# Altium PCB PCB1.PcbDoc
Units mil, origin at the board's own origin, x right, y up, seen from the top; angles counter-clockwise.
Board outline 3760 x 2995 mil, 2 copper layers (Top Layer, Bottom Layer); 104 components, 66 nets, 280 pads, 61 vias.
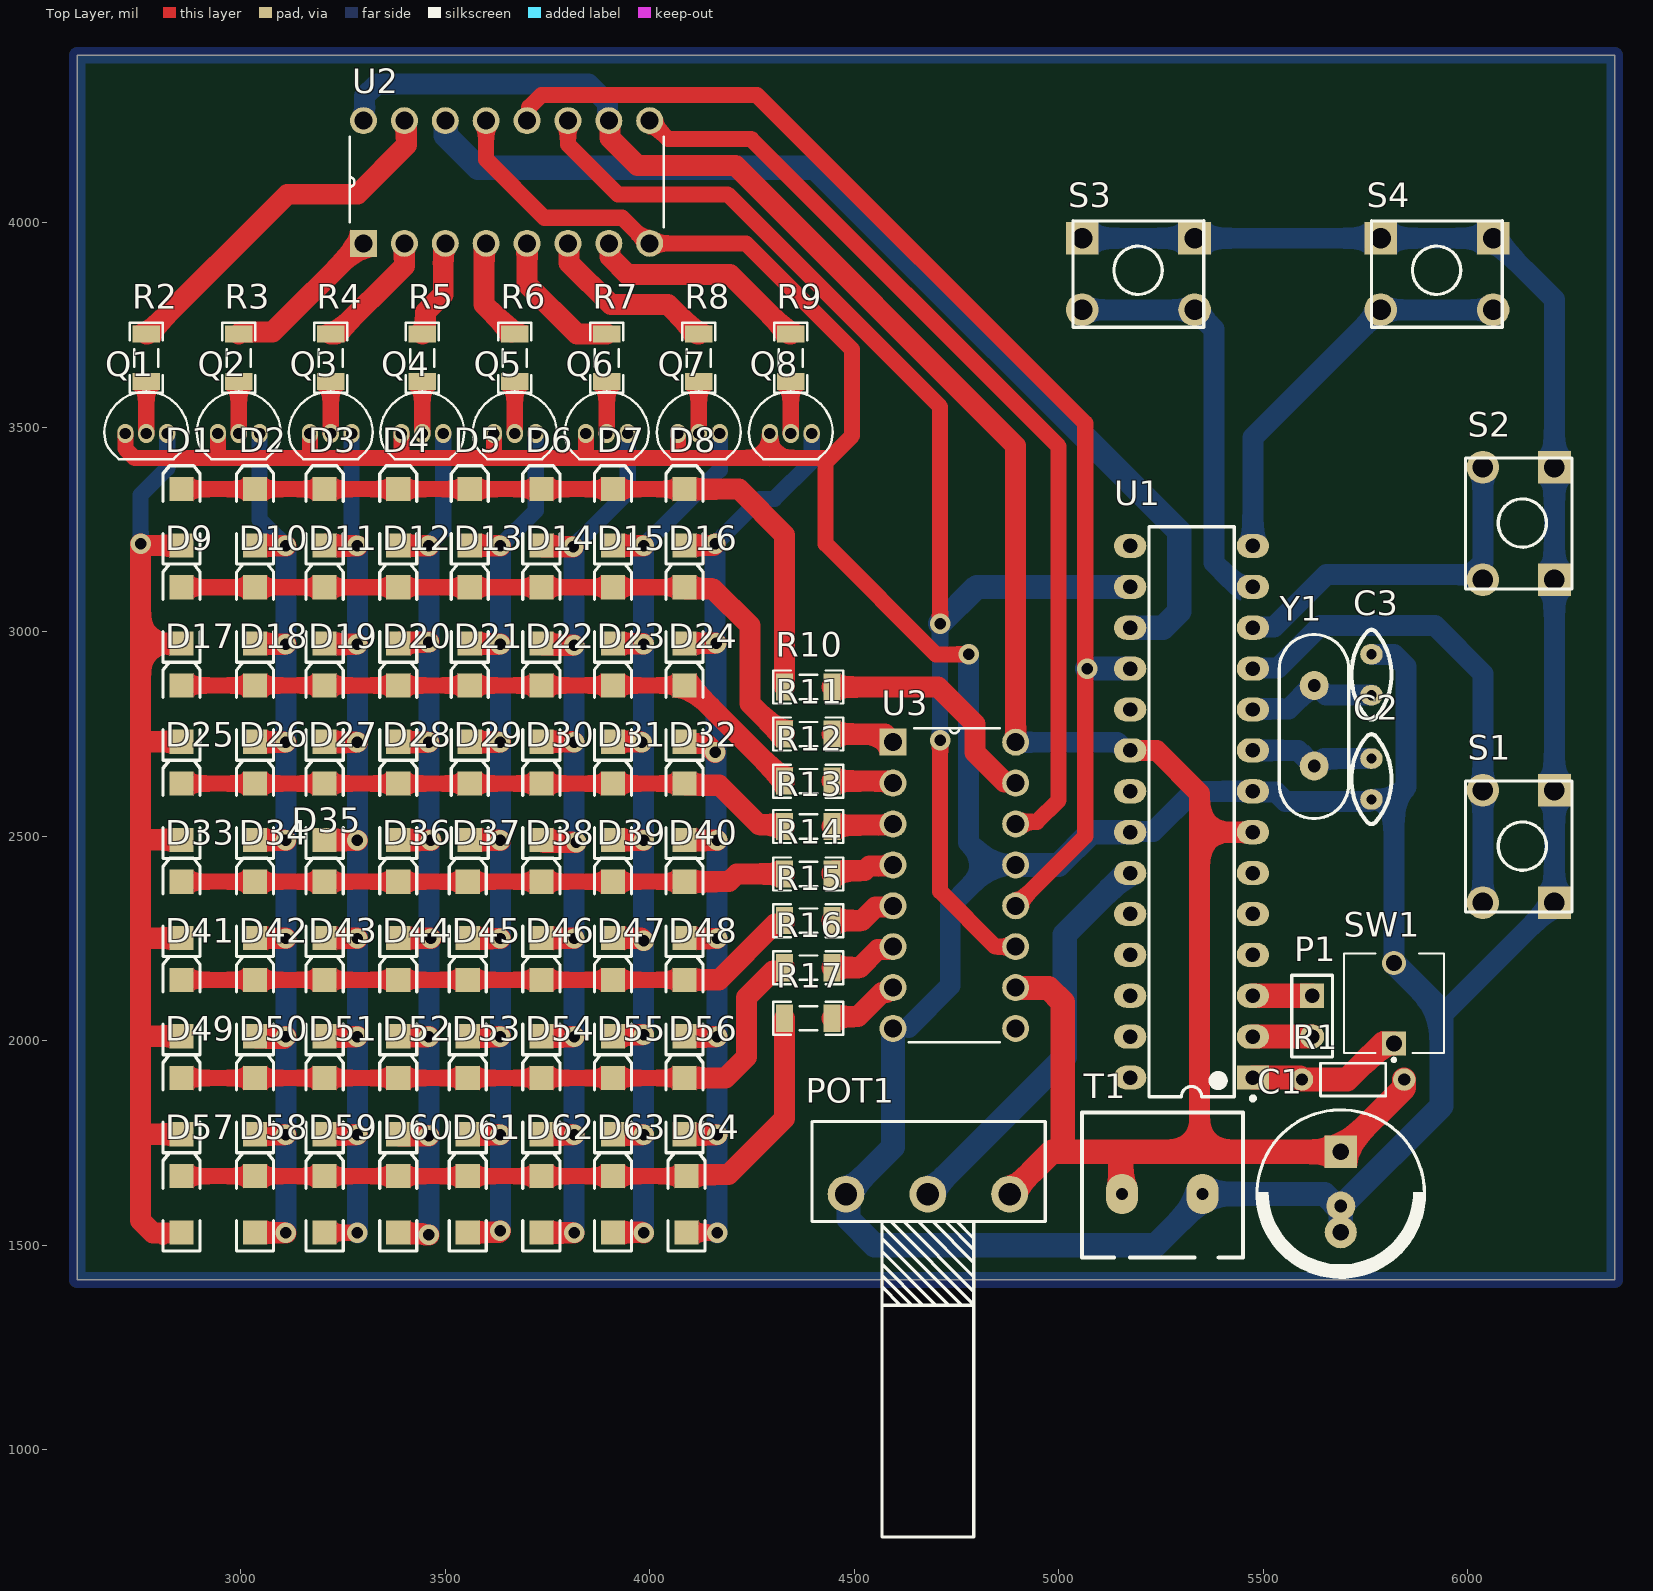
[diagram p0: Top Layer view]
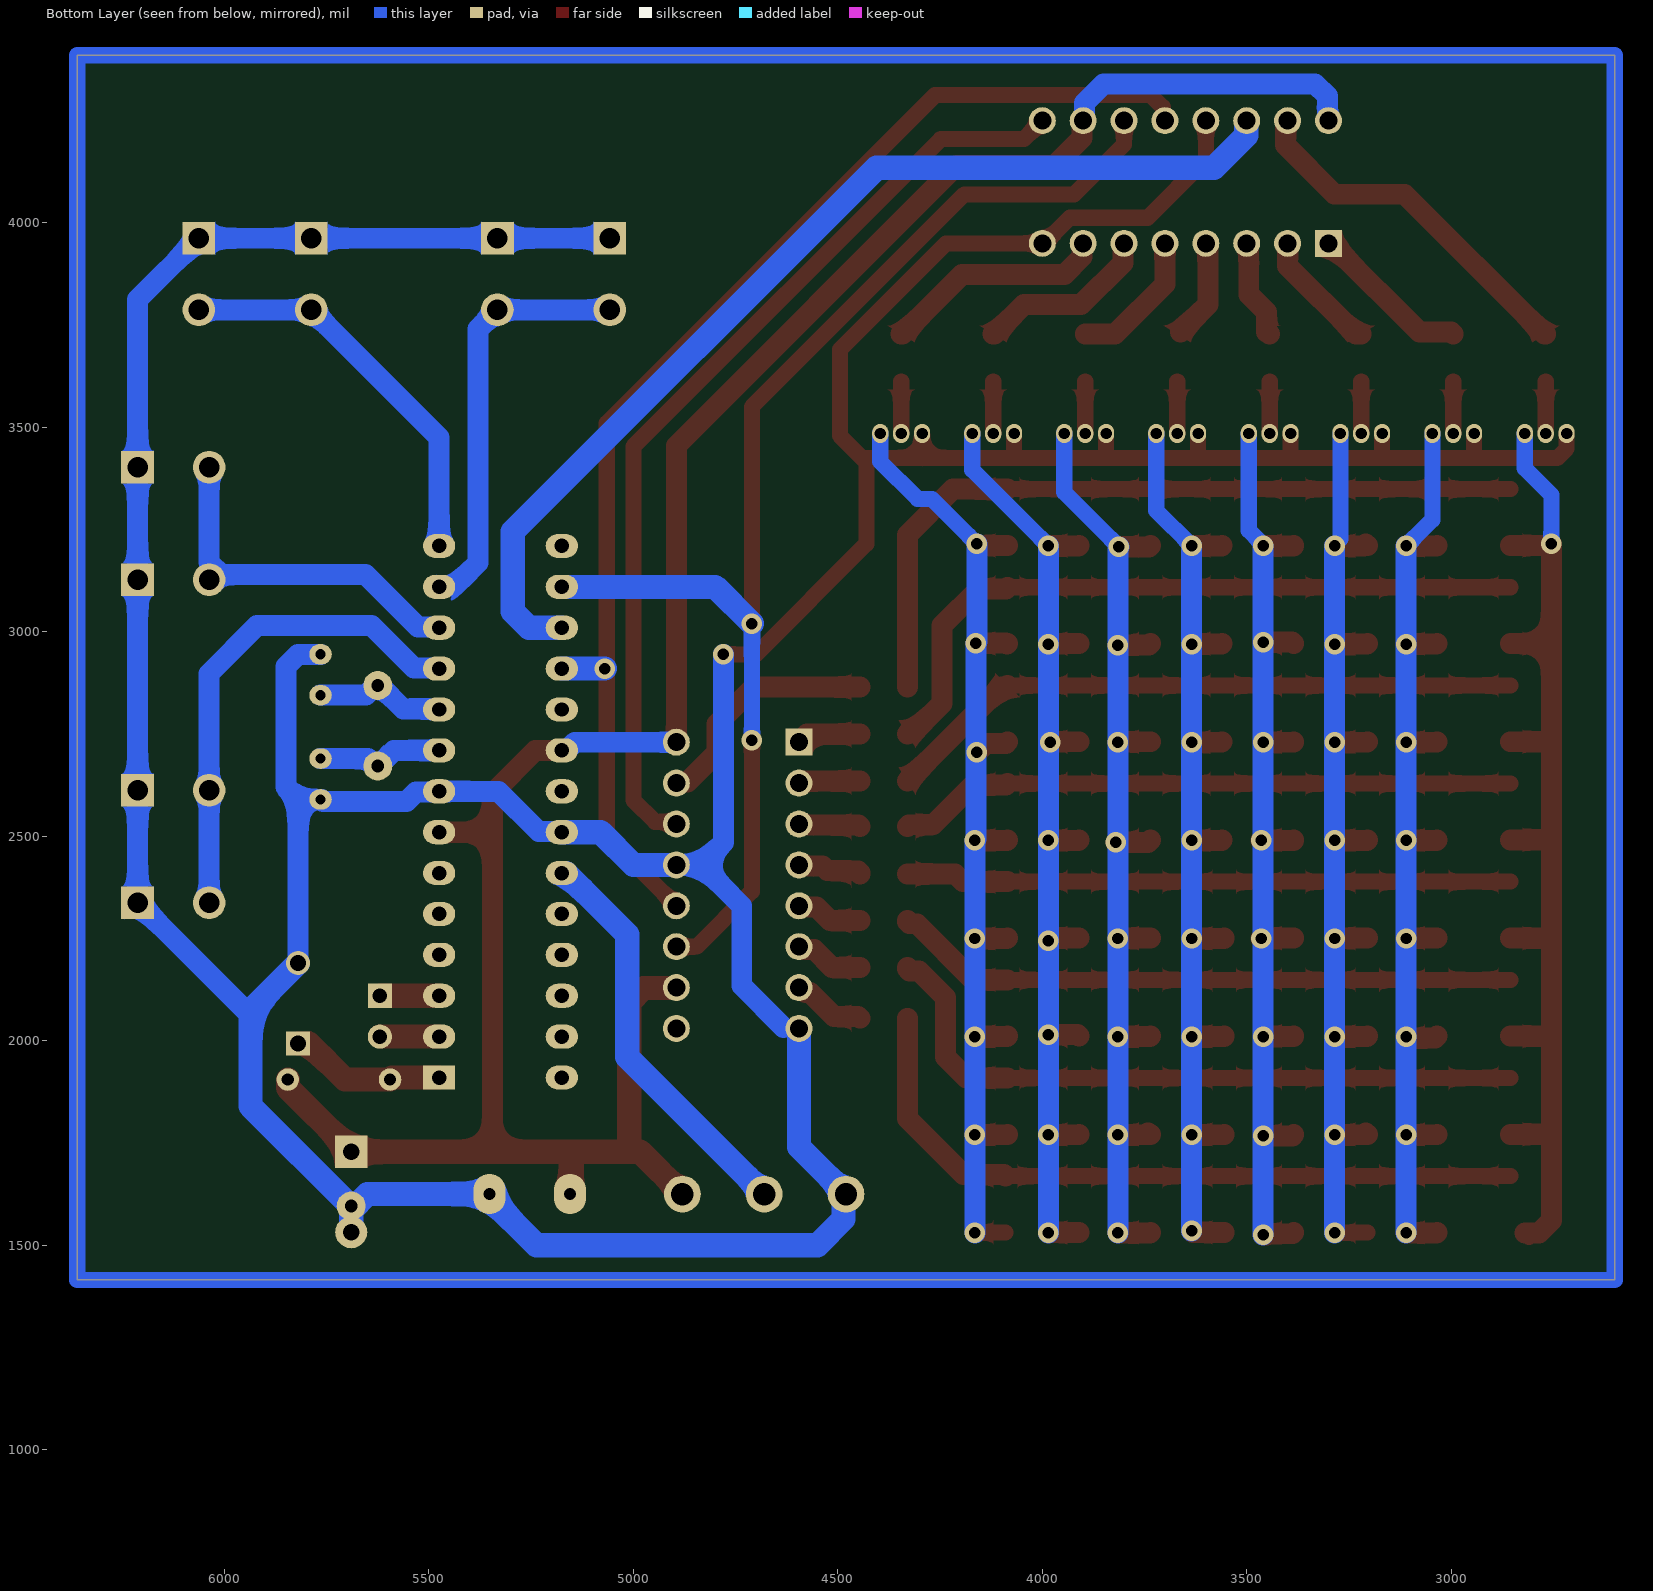
[diagram p1: Bottom Layer view, seen from below]
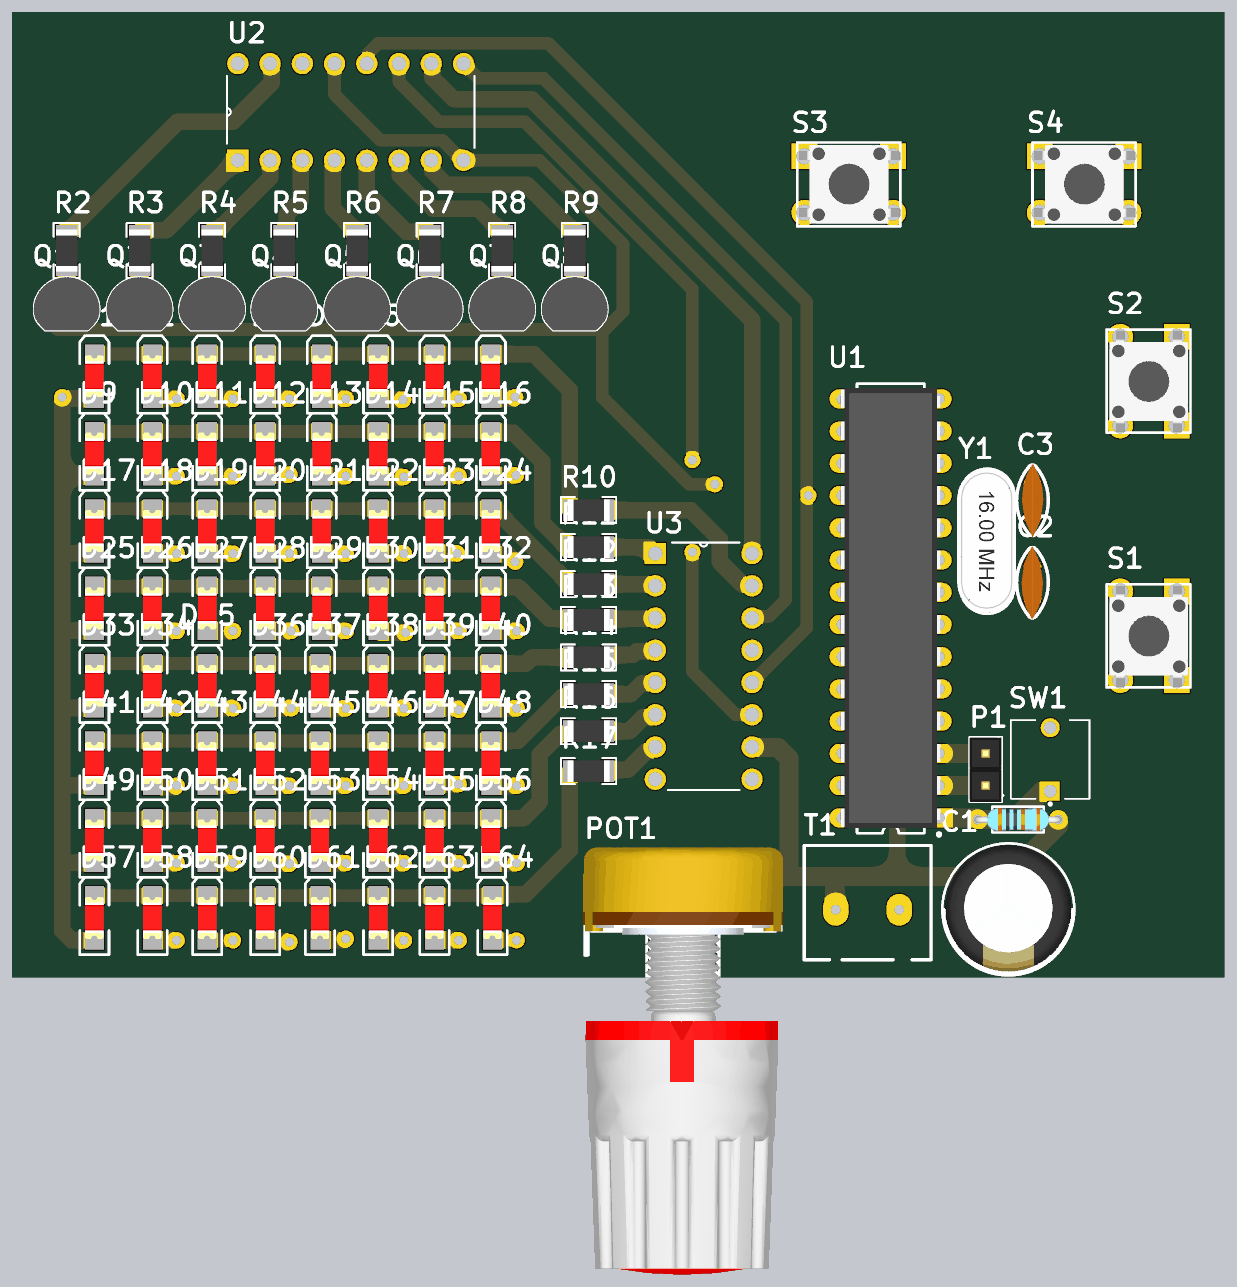
[diagram p2: 3D render of the assembled board from above, using the file's embedded part models]

## Layer stack, top to bottom
Top Solder: solder mask 0.4, Solder Resist, Dk 3.5
Top Layer: signal copper 1.4
Dielectric 1: dielectric 12.6, FR-4, Dk 4.8
Bottom Layer: signal copper 1.4
Bottom Solder: solder mask 0.4, Solder Resist, Dk 3.5

## Board outline
2600,1415 2600,4410 6360,4410 6360,1415

## Design rules (kind name [scope] priority, off if disabled: settings)
Clearance [All] p1: gap=10 ignorepadtopadclearanceinfootprint=FALSE except(0: Arc-Hole Track-Hole SMDPad-Hole THPad-Hole Via-Hole Fill-Hole Poly-Hole Region-Hole Text-Hole)
PolygonConnect [All] p1: connectstyle=Relief reliefconductorwidth=10 reliefentries=4 polygonreliefangle="90 Angle" airgapwidth=10
RoutingVias [All] p1: holewidth=28 width=50 viastyle="Through Hole" minholewidth=28 minwidth=50 maxholewidth=28 maxwidth=50
SolderMaskExpansion [All] p1: expansion=4 istentingtop=FALSE
Width [All] p1: maxlimit=59.06 minlimit=39.37 preferedwidth=51.18
30 further rules are at their usual default settings.

## Classes and differential pairs
component class Sheet2: C1 C2 C3 P1 POT1 Q1 Q2 Q3 Q4 Q5 Q6 Q7 Q8 R1 R2 R3 R4 R5 R6 R7 R8 R9 SW1 T1 U1 U2 U3 Y1
component class Sheet1: D1 D2 D3 D4 D5 D6 D7 D8 D9 D10 D11 D12 D13 D14 D15 D16 D17 D18 D19 D20 D21 D22 D23 D24 D25 D26 D27 D28 D29 D30 D31 D32 D33 D34 D35 D36 D37 D38 D39 D40 D41 D42 D43 D44 D45 D46 D47 D48 D49 D50 D51 D52 D53 D54 D55 D56 D57 D58 D59 D60 D61 D62 D63 D64 R10 R11 R12 R13 R14 R15 R16 R17

## Components (designator, comment, footprint, x,y, rotation, side; value= is the part's Value field where it differs from the comment)
C1 "1000uf" "Cap electrolitic radial 10x20-5" 5690,1630 r270 top
C2 "100nF" Cap-100nF 5765,2640 r270 top
C3 "100nF" Cap-100nF 5765,2895 r90 top
D1 "SMD 1206 LED" "LED 1206" 2855,3280 r90 top
D2 "SMD 1206 LED" "LED 1206" 3035,3280 r90 top
D3 "SMD 1206 LED" "LED 1206" 3205,3280 r90 top
D4 "SMD 1206 LED" "LED 1206" 3385,3280 r90 top
D5 "SMD 1206 LED" "LED 1206" 3560,3280 r90 top
D6 "SMD 1206 LED" "LED 1206" 3735,3280 r90 top
D7 "SMD 1206 LED" "LED 1206" 3910,3280 r90 top
D8 "SMD 1206 LED" "LED 1206" 4085,3280 r90 top
D9 "SMD 1206 LED" "LED 1206" 2855,3040 r90 top
D10 "SMD 1206 LED" "LED 1206" 3035,3040 r90 top
D11 "SMD 1206 LED" "LED 1206" 3205,3040 r90 top
D12 "SMD 1206 LED" "LED 1206" 3385,3040 r90 top
D13 "SMD 1206 LED" "LED 1206" 3560,3040 r90 top
D14 "SMD 1206 LED" "LED 1206" 3735,3040 r90 top
D15 "SMD 1206 LED" "LED 1206" 3910,3040 r90 top
D16 "SMD 1206 LED" "LED 1206" 4085,3040 r90 top
D17 "SMD 1206 LED" "LED 1206" 2855,2800 r90 top
D18 "SMD 1206 LED" "LED 1206" 3035,2800 r90 top
D19 "SMD 1206 LED" "LED 1206" 3205,2800 r90 top
D20 "SMD 1206 LED" "LED 1206" 3385,2800 r90 top
D21 "SMD 1206 LED" "LED 1206" 3560,2800 r90 top
D22 "SMD 1206 LED" "LED 1206" 3735,2800 r90 top
D23 "SMD 1206 LED" "LED 1206" 3910,2800 r90 top
D24 "SMD 1206 LED" "LED 1206" 4085,2800 r90 top
D25 "SMD 1206 LED" "LED 1206" 2855,2560 r90 top
D26 "SMD 1206 LED" "LED 1206" 3035,2560 r90 top
D27 "SMD 1206 LED" "LED 1206" 3205,2560 r90 top
D28 "SMD 1206 LED" "LED 1206" 3385,2560 r90 top
D29 "SMD 1206 LED" "LED 1206" 3560,2560 r90 top
D30 "SMD 1206 LED" "LED 1206" 3735,2560 r90 top
D31 "SMD 1206 LED" "LED 1206" 3910,2560 r90 top
D32 "SMD 1206 LED" "LED 1206" 4085,2560 r90 top
D33 "SMD 1206 LED" "LED 1206" 2855,2320 r90 top
D34 "SMD 1206 LED" "LED 1206" 3035,2320 r90 top
D35 "SMD 1206 LED" "LED 1206" 3205,2320 r90 top
D36 "SMD 1206 LED" "LED 1206" 3385,2320 r90 top
D37 "SMD 1206 LED" "LED 1206" 3555,2320 r90 top
D38 "SMD 1206 LED" "LED 1206" 3735,2320 r90 top
D39 "SMD 1206 LED" "LED 1206" 3910,2320 r90 top
D40 "SMD 1206 LED" "LED 1206" 4085,2320 r90 top
D41 "SMD 1206 LED" "LED 1206" 2855,2080 r90 top
D42 "SMD 1206 LED" "LED 1206" 3035,2080 r90 top
D43 "SMD 1206 LED" "LED 1206" 3205,2080 r90 top
D44 "SMD 1206 LED" "LED 1206" 3385,2080 r90 top
D45 "SMD 1206 LED" "LED 1206" 3555,2080 r90 top
D46 "SMD 1206 LED" "LED 1206" 3735,2080 r90 top
D47 "SMD 1206 LED" "LED 1206" 3910,2080 r90 top
D48 "SMD 1206 LED" "LED 1206" 4085,2080 r90 top
D49 "SMD 1206 LED" "LED 1206" 2855,1840 r90 top
D50 "SMD 1206 LED" "LED 1206" 3035,1840 r90 top
D51 "SMD 1206 LED" "LED 1206" 3205,1840 r90 top
D52 "SMD 1206 LED" "LED 1206" 3385,1840 r90 top
D53 "SMD 1206 LED" "LED 1206" 3555,1840 r90 top
D54 "SMD 1206 LED" "LED 1206" 3735,1840 r90 top
D55 "SMD 1206 LED" "LED 1206" 3910,1840 r90 top
D56 "SMD 1206 LED" "LED 1206" 4085,1840 r90 top
D57 "SMD 1206 LED" "LED 1206" 2855,1600 r90 top
D58 "SMD 1206 LED" "LED 1206" 3035,1600 r90 top
D59 "SMD 1206 LED" "LED 1206" 3205,1600 r90 top
D60 "SMD 1206 LED" "LED 1206" 3385,1600 r90 top
D61 "SMD 1206 LED" "LED 1206" 3555,1600 r90 top
D62 "SMD 1206 LED" "LED 1206" 3735,1600 r90 top
D63 "SMD 1206 LED" "LED 1206" 3910,1600 r90 top
D64 "SMD 1206 LED" "LED 1206" 4090,1600 r90 top
P1 "Header 2" HDR1X2 5620,2110 r270 top
POT1 "10K" POT 4480,1625 r0 top
Q1 "BC547" "TO-92 STR" 2768.82,3485 r0 top
Q2 "BC547" "TO-92 STR" 2995,3485 r0 top
Q3 "BC547" "TO-92 STR" 3220,3485 r0 top
Q4 "BC547" "TO-92 STR" 3443.82,3485 r0 top
Q5 "BC547" "TO-92 STR" 3670,3485 r0 top
Q6 "BC547" "TO-92 STR" 3895,3485 r0 top
Q7 "BC547" "TO-92 STR" 4120,3485 r0 top
Q8 "BC547" "TO-92 STR" 4345,3485 r0 top
R1 "10K" RES-(1/4) 5720,1905 r0 top
R2 "1K" RES1206 2768.82,3670 r90 top
R3 "1K" RES1206 2995,3670 r90 top
R4 "1K" RES1206 3220,3670 r90 top
R5 "1K" RES1206 3443.82,3670 r90 top
R6 "1K" RES1206 3670,3670 r90 top
R7 "1K" RES1206 3895,3670 r90 top
R8 "1K" RES1206 4120,3670 r90 top
R9 "1K" RES1206 4345,3670 r90 top
R10 "330" RES1206 4388.07,2865 r180 top
R11 "330" RES1206 4388.07,2750 r180 top
R12 "330" RES1206 4388.07,2635 r180 top
R13 "330" RES1206 4388.07,2523.9 r180 top
R14 "330" RES1206 4388.07,2407.8 r180 top
R15 "330" RES1206 4388.07,2293.9 r180 top
R16 "330" RES1206 4388.07,2178.9 r180 top
R17 "330" RES1206 4388.07,2055 r180 top
S1 "Switch PB" "Switch - Push to On" 6125,2475 r270 top
S2 "Switch PB" "Switch - Push to On" 6125,3265 r270 top
S3 "Switch PB" "Switch - Push to On" 5195,3875 r0 top
S4 "Switch PB" "Switch - Push to On" 5925,3875 r0 top
SW1 "FSM8JRT" TE_FSM8JRT 5820,1993 r90 top
T1 "Terminal" "Terminal 1*2" 5056.85,1470 r0 top
U1 "ATmega328A-PU" 28P3 5325,2560 r180 top
U2 "74HC595N,112" DIP254P762X420-16 4000,4250 r90 top
U3 "74HC595N,112" DIP254P762X420-16 4895,2030 r0 top
Y1 "16 MHz" "XTAL 16MHZ" 5625,2770 r270 top value="12 MHz"

## Footprints (in the part's own frame and the unit in brackets; to place one, negate y for a bottom-side part, rotate by r counter-clockwise, add the part's x,y. Pads: shape width x height; smd on the part's side, far side on the other; paste and mask are expansions set on the pad)
28P3 [mm] "DIP, 28-Leads, Row Spacing 7.62mm, Pitch 2.54mm, Body 34.67x7.3mm"
  rect 2x1.5 hole 0.9: 1(-3.81,16.51)
  oval 2x1.5 hole 0.9: 2(-3.81,13.97) 3(-3.81,11.43) 4(-3.81,8.89) 5(-3.81,6.35) 6(-3.81,3.81) 7(-3.81,1.27) 8(-3.81,-1.27) 9(-3.81,-3.81) 10(-3.81,-6.35) 11(-3.81,-8.89) 12(-3.81,-11.43) 13(-3.81,-13.97) 14(-3.81,-16.51) 15(3.81,-16.51) 16(3.81,-13.97) 17(3.81,-11.43) 18(3.81,-8.89) 19(3.81,-6.35) 20(3.81,-3.81) 21(3.81,-1.27) 22(3.81,1.27) 23(3.81,3.81) 24(3.81,6.35) 25(3.81,8.89) 26(3.81,11.43) 27(3.81,13.97) 28(3.81,16.51)
  silkscreen extent -3.94,-17.7 2.65,17.93, body extent -3.95,-17.35 3.95,17.3, height 5.04
"Cap electrolitic radial 10x20-5" [mm] "Cap electrolitic radial 10x20-5-Design:Abbas Basereh"
  rect 2x2 hole 1: 1(-2.5,0)
  round 1.8 hole 0.8: 2(0.875,0)
  round 2 hole 1: 2(2.5,0)
  silkscreen extent -5.1,-5.2 5.3,5.2, body extent -5,-5 5,5, height 20
Cap-100nF [mil] "Bipolar Capacitor-Design:Ali Hafizi"
  oval 50x55 hole 25: 1(-50,0) 2(50,0)
  silkscreen extent -110,-49 110,49, body extent -115,-34 115,33, height 272
DIP254P762X420-16 [mil]
  rect 66x66 hole 44: 1(-300,700)
  round 66 hole 44: 2(-300,600) 3(-300,500) 4(-300,400) 5(-300,300) 6(-300,200) 7(-300,100) 8(-300,0) 9(0,0) 10(0,100) 11(0,200) 12(0,300) 13(0,400) 14(0,500) 15(0,600) 16(0,700)
  silkscreen extent -261,-34 -39,734
HDR1X2 [mm] "Connector; Header; 2 Position"
  rect 1.5x1.5 hole 0.9: 1(0,0)
  round 1.5 hole 0.9: 2(2.54,0)
  silkscreen extent -1.27,-1.27 3.81,1.27, body extent -1.27,-1.28 3.81,1.26, height 8.79
"LED 1206" [mm]
  rect 1.5x1.5 smd: 1(-1.75,0) 2(1.75,0)
  silkscreen extent -2.9,-1.15 3.2,1.15, body extent -1.65,-0.72 1.65,0.73, height 1.36
POT [mil] "Voloume"
  round 90 hole 55: 1(0,0) 2(400,0) 3(200,0)
  silkscreen extent -83,-839 487,177, body extent -109,-1132 511,193, height 926
RES1206 [mm] "Chip Resistor, 2-Leads, Body 3/20x1/60mm, IPC Medium Density DESIGNER:ABBAS BASEREH"
  rect 1.05x1.7 smd: 1(-1.475,0) 2(1.475,0)
  silkscreen extent -2.17,-1.02 2.17,1.02, body extent -1.65,-0.85 1.65,0.85, height 0.94
RES-(1/4) [mil]
  round 55 hole 30: 1(-125,0) 2(125,0)
  silkscreen extent -80,-40 80,40, body extent -135,-36 135,36, height 115
"Switch - Push to On" [mil]
  rect 80x80 hole 50: 1(-137.5,87.5) 1(137.5,87.5)
  round 80 hole 50: 2(-137.5,-87.5) 2(137.5,-87.5)
  silkscreen extent -160,-130 160,130, body extent -155,-121 157,123, height 205
TE_FSM8JRT [mil]
  rect 59x59 hole 39: 1(0,0)
  round 59 hole 39: 2(197,0)
  silkscreen extent -44,-122 220,122
"Terminal 1*2" [mil]
  oval 78.74x98.43 hole 30: 1(98.15,155) 2(295,155)
  silkscreen extent 0,0 394,354
"TO-92 STR" [mm] "DESIGNER :ABBAS BASEREH"
  oval 1x1.2 hole 0.7 mask+0.06: 1(-1.3,0) 2(0,0) 3(1.3,0)
  silkscreen extent -2.6,-1.59 2.6,2.61, body extent -2.61,-1.59 2.61,2.61, height 10
"XTAL 16MHZ" [mm] "Crystal Oscillator"
  round 1.8 hole 0.8: 1(-2.5,0) 2(2.5,0)
  silkscreen extent -5.67,-2.18 5.76,2.15, body extent -5.68,-2.38 5.67,2.27, height 0.99

## Part data
C1: library part "Cap electrolitic radial 10x21", "Cap electrolitic radial", Data=16-12-2016, Designer="Abbas Basereh", Part. No=100U/50V
C2 C3: library part "CAP CERAMIC TOTAL SIZE", "CAP Ceramic Total", Designer="Ali Hafizi"
D1 D2 D3 D4 D5 D6 D7 D8 D9 D10 D11 D12 D13 D14 D15 D16 D17 D18 D19 D20 D21 D22 D23 D24 D25 D26 D27 D28 D29 D30 D31 D32 D33 D34 D35 D36 D37 D38 D39 D40 D41 D42 D43 D44 D45 D46 D47 D48 D49 D50 D51 D52 D53 D54 D55 D56 D57 D58 D59 D60 D61 D62 D63 D64: library part "LED SMD 1206"
P1: "Header, 2-Pin", LatestRevisionDate=17-Jul-2002, LatestRevisionNote="Re-released for DXP Platform.", Publisher="Altium Limited"
POT1: library part POT, "Variable Resistor"
Q1 Q2 Q3 Q4 Q5 Q6 Q7 Q8: "NPN General-purpose Transistor", Data=27-12-2016, Desc.="Plastic Medium-Power. Silicon NPN Transistors", Designer="Abbas Basereh"
R1: library part "RES DIP PACKAGE", "TOTAL DIP RESISTOR PACK", Designer="Ali Hafizi"
R2 R3 R4 R5 R6 R7 R8 R9 R10 R11 R12 R13 R14 R15 R16 R17: library part "RES SMD PACKAGE", "TOTAL SMD RESISTOR PACK", Data=2017-3-10, Desc.="RES SMD PAKAGES", Designer="Abbas Basereh"
S1 S2 S3 S4: "Push Button Switch"
SW1: "Switch Tactile OFF _ON_ SPST Round Button PC Pins 0.05A 12VDC 1.57N Thru-Hole Radial Tape", Contact_Current_Rating="50 mA", Package=None, Availability=Unavailable, Configuration_Pole-Throw="Single Pole - Single Throw", EU_RoHS_Compliance=Compliant, MF="TE Connectivity", MP=FSM8JRT, Price=None, SnapEDA_Link=https://www.snapeda.com/parts/FSM8JRT/TE%20Connectivity%20ALCOSWITCH%20Switches/view-part/226999/?ref=snap, TE_purchase_URL=https://www.te.com/usa-en/product-147694-1.html?te_bu=Cor&te_type=disp&te_campaign=seda_glo_cor-seda-global-disp-prtnr-fy19-seda-model-bom-cta_sma-317_1&elqCampaignId=32493
T1: library part "Terminal 1*2", "Terminal 2 Pin 250VAC 16A", ComponentLinkURL=www.picpars.com, Designer="Seyed Mohsen Ghasemain", E-mail=picpars@gmail.com
U1: library part ATmega8A-PU, "8-bit AVR Microcontroller, 8KB Flash, 512 Bytes EEPROM, 1KB SRAM, 28-pin PDIP, Industrial Grade (-40°C to 85°C)", Supplier Part Number 1=ATMEGA8A-PU-ND, ComponentLink1Description="Manufacturer Link", ComponentLink1URL=http://www.atmel.com/products/avr/default.asp?, ComponentLink2Description="ATmega8A Datasheet", ComponentLink2URL=http://www.atmel.com/dyn/resources/prod_documents/doc8159.pdf, ComponentLink3Description="ATmega8A Summary", ComponentLink3URL=http://www.atmel.com/dyn/resources/prod_documents/8159S.pdf, ComponentLink4Description="Atmel.com Home", ComponentLink4URL=http://www.atmel.com, DatasheetVersion=2017-1-5, PackageDescription="28-lead (0.300\"/7.62mm Wide) Plastic Dual Inline Package (PDIP)", PackageReference=28P3, PackageVersion=2017-1-5, Published=2017-1-5, Publisher="Abbas Basereh", Supplier 1=Digi-Key, Supplier 2=Farnell, Supplier 3=Mouser, Supplier Part Number 2=1748534, Supplier Part Number 3=556-ATMEGA8A-PU
U2 U3: "Shift Shift Register 1 Element 8 Bit 16-DIP", Package="DIP-16 NXP Semiconductors", Availability=Unavailable, DigiKey-Purchase-URL=https://snapeda.com/shop?store=DigiKey&id=32067, MF="NXP USA", MP=74HC595N,112, Price=None, SnapEDA_Link=https://www.snapeda.com/parts/74HC595N,112/NXP%20USA%20Inc./view-part/32067/?ref=snap
Y1: library part XTAL, "XTAL Crystal", ComponentLink1Description=Datasheet, ComponentLink2Description=Reference, Design Date=2017-1-3, Designer="ABBAS BASEREH", Mounting Technology="Surface Mount\Through-Hole", Status=Unreleased

## Via types
v1: diameter 50, hole 28, Top Layer to Bottom Layer, 61 vias

## Nets (pads, with @x,y where several pads share a name; then routed paths per layer and width w, separated by ;. In a path a pad name is that pad's centre, name@x,y a point inside that pad or via, vN(x,y) a via of type N, cw(c..) or ccw(c..) an arc to the next point about the centre after c; other vN are vias at no path point)
+5: C1.1 POT1.2 R1.2 T1.1 U1.7 U1.20 U2.10 U2.16 U3.10 U3.16 | length 6013.4
  Top Layer w51.18: U2.10 3902.84,4247.16 3902.84,4207.16 3970,4140 4210,4140 4895,3455 U3.16 ; U1.20 5240,2710 5345,2605 5345,2510 ; 5345,1728.43 5345,2510 ; U1.7 5345,2510
  Top Layer w59.06: POT1.2 4983.43,1728.43 5025,1728.43 ; U3.10 4896.33,2128.67 4975.41,2128.67 5010,2094.08 5010,1743.43 5025,1728.43 ; T1.1 5151.23,1628.77 5151.23,1727.19 5150,1728.43 ; R1.2 5845,1885 5699.84,1739.84 5699.84,1738.27 C1.1 5345,1728.43 5150,1728.43 ; 5025,1728.43 5150,1728.43
  Bottom Layer w51.18: U2.16 3302.84,4252.84 3302.84,4310.02 3332.82,4340 3850,4340 3897.16,4292.84 3897.16,4252.84 U2.10 ; U3.16 5143.03,2730 5163.03,2710 U1.20
GND: C1.2 C2.2 C3.2 POT1.1 Q1.1 Q2.1 Q3.1 Q4.1 Q5.1 Q6.1 Q7.1 Q8.1 S1.1 S2.1 S3.1 S4.1 SW1.2 T1.2 U1.8 U1.22 U2.8 U2.13 U3.8 U3.13 | length 12959
  Top Layer w39.37: Q1.1 2717.64,3448.06 2740.7,3425 2940,3425 ; Q2.1 2943.82,3428.82 2940,3425 ; Q3.1 3168.82,3433.82 3160,3425 ; Q4.1 3392.64,3432.36 3400,3425 ; U2.13 3600,4155 3742.31,4012.69 3932.5,4012.69 3995.18,3950 U2.8 4235,3950 4495,3690 4495,3480 4430,3415 4430,3215 4700,2945 v1(4780,2945) ; Q5.1 3618.82,3426.18 3620,3425 ; Q6.1 3843.82,3426.18 3845,3425 ; Q7.1 4068.82,3428.82 4065,3425 ; Q8.1 4293.82,3425 ; 4430,3425 4293.82,3425 ; 2940,3425 3160,3425 ; 3160,3425 3400,3425 ; 3400,3425 3620,3425 ; 3620,3425 3845,3425 ; 3845,3425 4065,3425 ; 4065,3425 4293.82,3425
  Bottom Layer w51.18: 4632.84,2032.84 4735,2135 4735,2330 4785,2380 4835,2430 ; v1(4780,2945) 4780,2485 4835,2430 ; U3.13 4835,2430 ; S3.1@5057.5,3962.5 5332.5,3962.5 5787.5,3962.5 6062.5,3962.5 6212.5,3812.5 6212.5,3402.5 6212.5,3127.5 6212.5,2612.5 6212.5,2337.5 5948.78,2073.78 5936.22,2073.78 ; U1.22 5176.4,2511.41 5231.4,2511.41 5330,2610 U1.8 5476.51,2608.49 5531.51,2608.49 5555,2585 5758.68,2585 5763.09,2589.41 5764.41,2589.41 C2.2 5820,2590 ; C3.2 5820.02,2945 5850,2915.02 5850,2620 5820,2590 ; SW1.2 5820,2590
  Bottom Layer w59.06: U3.8 4595,1740 POT1.1 4485.92,1619.08 4485.92,1564.08 4550,1500 5236.69,1500 5345.42,1608.73 5345.42,1618.57 T1.2 5650,1625 5690,1585 C1.2@5690,1531.57 ; U3.13 5000,2430 5080,2510 U1.22 ; C1.2@5690,1595.55 5691.77,1595.55 5936.22,1840 5936.22,2073.78 SW1.2
NetC2_1: C2.1 U1.9 Y1.2 | length 313.5
  Bottom Layer w51.18: U1.9 5585.93,2710 5624.35,2671.57 Y1.2 5630.33,2671.57 5648.75,2690 C2.1
NetC3_1: C3.1 U1.10 Y1.1 | length 323.9
  Bottom Layer w51.18: U1.10 5476.51,2811.51 5562.75,2811.51 5619.67,2868.43 Y1.1 5630.33,2868.43 5653.75,2845 C3.1
NetD1_1: D1.1 D9.1 D17.1 D25.1 D33.1 D41.1 D49.1 D57.1 Q1.3 | length 2748.4
  Top Layer w39.37: 2810,1520.56 2819.44,1530
  Top Layer w51.18: 2819.44,1530 2784.98,1530 2755,1559.98 2755,1775 ; D49.1 2758.9,1771.1 2755,1775 ; D41.1 2758.9,2011.1 2755,2015 ; D33.1 2756.1,2251.1 2755,2250 ; D25.1 2756.1,2491.1 2755,2490 ; D17.1 2756.1,2731.1 2755,2730 ; D9.1 2755,2971.1 ; D1.1 2758.9,3211.1 v1(2755,3215) 2755,2971.1 ; 2755,1775 2755,2015 ; 2755,2015 2755,2250 ; 2755,2250 2755,2490 ; 2755,2490 2755,2730 ; 2755,2730 2755,2971.1
  Bottom Layer w39.37: v1(2755,3215) 2755,3335 2820,3400 Q1.3
NetD1_2: D1.2 D2.2 D3.2 D4.2 D5.2 D6.2 D7.2 D8.2 R10.2 | length 1893.2
  Top Layer w39.37: D1.2 D2.2 D3.2 D4.2 D5.2 D6.2 D7.2 D8.2
  Top Layer w51.18: D8.2 4217.93,3348.9 4330,3236.83 R10.2
NetD2_1: D2.1 D10.1 D18.1 D26.1 D34.1 D42.1 D50.1 D58.1 Q2.3 | length 2588.8
  Top Layer w51.18: D58.1 D58.1@3036.1,1530 ; D50.1 3036.1,1770 v1(3110,1770) ; D42.1 3038.94,2007.17 3061.8,2007.17 3063.28,2005.68 3105.68,2005.68 v1(3110,2010) ; D34.1 3108.9,2251.1 v1(3110,2250) ; D26.1 3036.1,2490 v1(3110,2490) ; D18.1 3036.1,2730 v1(3110,2730) ; D10.1 3036.1,2970 v1(3110,2970) ; D2.1 3036.1,3210 v1(3110,3210) ; D58.1@3036.18,1529.92 D58.1@3036.1,1530 ; v1(3110,1530) D58.1@3036.1,1530
  Bottom Layer w39.37: Q2.3 3046.18,3273.82 v1(3110,3210)
  Bottom Layer w51.18: v1(3110,1530) v1(3110,1770) v1(3110,2730) v1(3110,2970) v1(3110,3210)
NetD3_1: D3.1 D11.1 D19.1 D27.1 D35.1 D43.1 D51.1 D59.1 Q3.3 | length 2610.6
  Top Layer w39.37: D59.1 3205.55,1530.55 v1@3261.18,1530.55 ; v1@3261.18,1530 v1(3285,1530)
  Top Layer w51.18: D51.1 3208.9,1775 3213.9,1770 v1(3285,1770) ; D43.1 3206.1,2010 v1(3285,2010) ; D35.1 3283.9,2251.1 v1(3285,2250) ; D27.1 3206.1,2490 v1(3285,2490) ; D19.1 3206.1,2730 v1(3285,2730) ; D11.1 3206.1,2970 v1(3285,2970) ; D3.1 3208.9,3215 3213.9,3210 v1(3285,3210)
  Bottom Layer w39.37: Q3.3 3271.18,3226.7 3285,3212.88 v1(3285,3210)
  Bottom Layer w51.18: v1(3285,1530) v1(3285,1770) v1(3285,2010) v1(3285,2250) v1(3285,2490) v1(3285,2730) v1(3285,2970) v1(3285,3210)
NetD4_1: D4.1 D12.1 D20.1 D28.1 D36.1 D44.1 D52.1 D60.1 Q4.3 | length 2595.3
  Top Layer w39.37: v1@3460,1522.12 v1(3460,1525)
  Top Layer w51.18: D60.1 3388.18,1527.92 3447.08,1527.92 3450,1525 v1(3460,1525) ; D52.1 3388.6,1767.5 v1(3460,1767.5) ; D44.1 3386.1,2010 v1(3460,2010) ; D36.1 3463.9,2251.1 v1(3465,2250) ; D28.1 3386.1,2490 v1(3465,2490) ; D20.1 3386.1,2730 v1(3460,2730) ; D12.1 3388.9,2975 v1(3460,2975) ; D4.1 3386.1,3210 v1(3460,3210)
  Bottom Layer w39.37: v1(3460,3210) 3460,3212.88 3495,3247.88 Q4.3
  Bottom Layer w51.18: v1(3460,1525) v1(3460,1767.5) v1(3460,2010) v1(3460,2730) v1(3460,2975) v1(3460,3210)
NetD5_1: D5.1 D13.1 D21.1 D29.1 D37.1 D45.1 D53.1 D61.1 Q5.3 | length 2613.4
  Top Layer w39.37: v1(3635,1535) v1@3637.03,1532.97
  Top Layer w51.18: D61.1 3631.1,1531.1 v1(3635,1535) ; D53.1 3556.1,1770 v1(3635,1770) ; D45.1 3556.1,2010 v1(3635,2010) ; D37.1 3556.1,2250 v1(3635,2250) ; D29.1 3561.1,2490 v1(3635,2490) ; D21.1 3561.1,2730 v1(3635,2730) ; D13.1 3561.1,2970 v1(3635,2970) ; D5.1 3561.1,3210 v1(3635,3210)
  Bottom Layer w39.37: v1(3635,3210) 3721.18,3296.18 Q5.3
  Bottom Layer w51.18: v1(3635,1535) v1(3635,1770) v1(3635,2010) v1(3635,2250) v1(3635,2730) v1(3635,2970) v1(3635,3210)
NetD6_1: D6.1 D14.1 D22.1 D30.1 D38.1 D46.1 D54.1 D62.1 Q6.3 | length 2665.8
  Top Layer w51.18: D62.1 3736.1,1530 v1(3815,1530) ; D54.1 3736.1,1770 3741.1,1775 3746.1,1770 v1(3815,1770) ; D46.1 3736.1,2010 v1(3815,2010) ; D38.1 3813.9,2251.1 v1(3815,2250) ; D30.1 3741.1,2485 v1(3820,2485) ; D22.1 3813.9,2731.1 v1(3815,2730) ; D14.1 3738.6,2967.5 v1(3815,2967.5) ; D6.1 3738.6,3207.5 v1(3812.5,3207.5)
  Bottom Layer w39.37: v1(3812.5,3207.5) 3946.18,3341.18 Q6.3
  Bottom Layer w51.18: v1(3812.5,3207.5) 3815,3205 v1(3815,2967.5) v1(3815,2730) v1(3815,2250) v1(3815,2010) v1(3815,1770) v1(3815,1530)
NetD7_1: D7.1 D15.1 D23.1 D31.1 D39.1 D47.1 D55.1 D63.1 Q7.3 | length 2636.9
  Top Layer w39.37: v1@3982.97,1527.97 v1(3985,1530)
  Top Layer w51.18: D63.1 3983.9,1531.1 v1(3985,1530) ; D55.1 3911.1,1770 v1(3985,1770) ; D47.1 3913.9,2015 v1(3985,2015) ; D39.1 3978.9,2251.1 v1(3985,2245) ; D31.1 3911.1,2490 v1(3985,2490) ; D23.1 3978.9,2731.1 v1(3980,2730) ; D15.1 3983.9,2971.1 v1(3985,2970) ; D7.1 3911.1,3210 v1(3985,3210)
  Bottom Layer w39.37: v1(3985,3210) 4171.18,3396.18 Q7.3
  Bottom Layer w51.18: v1(3985,1530) v1(3985,1770) v1(3985,2015) v1(3985,2245) v1(3985,2490) v1(3985,2970) v1(3985,3210)
NetD8_1: D8.1 D16.1 D24.1 D32.1 D40.1 D48.1 D56.1 D64.1 Q8.3 | length 2714.1
  Top Layer w39.37: D64.1 4090.55,1530.55 4164.45,1530.55 v1(4165,1530)
  Top Layer w51.18: D56.1 4086.1,1770 v1(4165,1770) ; D48.1 4086.1,2010 v1(4165,2010) ; D40.1 4086.1,2250 v1(4165,2250) ; D32.1 4086.1,2490 v1(4165,2490) ; D24.1 4088.94,2727.17 4137.83,2727.17 v1(4160,2705) ; D16.1 4086.1,2970 4088.6,2972.5 v1(4162.5,2972.5) ; D8.1 4156.1,3211.1 v1(4160,3215)
  Bottom Layer w39.37: v1(4160,3215) 4270,3325 4305,3325 4396.18,3416.18 Q8.3
  Bottom Layer w51.18: v1(4160,3215) 4160,2975 v1(4162.5,2972.5) 4162.5,2492.5 v1(4165,2490) v1(4165,2250) v1(4165,2010) v1(4165,1770) v1(4165,1530)
NetD9_2: D9.2 D10.2 D11.2 D12.2 D13.2 D14.2 D15.2 D16.2 R11.2 | length 1736.7
  Top Layer w39.37: D9.2 D10.2 D11.2 D12.2 D13.2 D14.2 D15.2 D16.2
  Top Layer w51.18: D16.2 4088.94,3104.96 4155.04,3104.96 4245,3015 4245,2825 4312.13,2757.87 4325.08,2757.87 4325.08,2754.92 R11.2
NetD17_2: D17.2 D18.2 D19.2 D20.2 D21.2 D22.2 D23.2 D24.2 R12.2 | length 1573.6
  Top Layer w39.37: D17.2 D18.2 D19.2 D20.2 D21.2 D22.2 D23.2 D24.2
  Top Layer w51.18: D24.2 4088.94,2864.96 4100.04,2864.96 4322.13,2642.87 4325.08,2642.87 4325.08,2639.92 R12.2
NetD25_2: D25.2 D26.2 D27.2 D28.2 D29.2 D30.2 D31.2 D32.2 R13.2 | length 1518.5
  Top Layer w39.37: D25.2 D26.2 D27.2 D28.2 D29.2 D30.2 D31.2 D32.2
  Top Layer w51.18: D32.2 4088.94,2624.96 4170.04,2624.96 4266.9,2528.1 4325.8,2528.1 R13.2
NetD33_2: D33.2 D34.2 D35.2 D36.2 D37.2 D38.2 D39.2 D40.2 R14.2 | length 1482.8
  Top Layer w39.37: D33.2 D34.2 D35.2 D36.2 D37.2 D38.2 D39.2 D40.2
  Top Layer w51.18: D40.2 4193.9,2388.9 4212.8,2407.8 R14.2
NetD41_2: D41.2 D42.2 D43.2 D44.2 D45.2 D46.2 D47.2 D48.2 R15.2 | length 1536.8
  Top Layer w39.37: D41.2 D42.2 D43.2 D44.2 D45.2 D46.2 D47.2 D48.2
  Top Layer w51.18: D48.2 4168.9,2148.9 4306.02,2286.02 4325.08,2286.02 4330,2290.94 R15.2
NetD49_2: D49.2 D50.2 D51.2 D52.2 D53.2 D54.2 D55.2 D56.2 R16.2 | length 1674.2
  Top Layer w39.37: D49.2 D50.2 D51.2 D52.2 D53.2 D54.2 D55.2 D56.2
  Top Layer w51.18: D56.2 4185.02,1908.9 4236.18,1960.06 4236.18,2106.18 4301.02,2171.02 4325.08,2171.02 4330,2175.94 R16.2
NetD57_2: D57.2 D58.2 D59.2 D60.2 D61.2 D62.2 D63.2 D64.2 R17.2 | length 1778.4
  Top Layer w39.37: D57.2 D58.2 D59.2 D60.2 D61.2 D62.2 D63.2 D64.2
  Top Layer w51.18: D64.2 4093.94,1672.83 4192.83,1672.83 4330,1810 R17.2
NetP1_1: P1.1 U1.3 | length 145
  Top Layer w59.06: U1.3 P1.1
NetP1_2: P1.2 U1.2 | length 145
  Top Layer w59.06: U1.2 P1.2
NetPOT1_3: POT1.3 U1.23 | length 995.8
  Bottom Layer w59.06: POT1.3 5015,1960 5015,2259.84 5165.16,2410 U1.23
NetQ1_2: Q1.2 R2.1 | length 126.9
  Top Layer w39.37: Q1.2 R2.1
NetQ2_2: Q2.2 R3.1 | length 126.9
  Top Layer w39.37: Q2.2 2995,3488.94 R3.1
NetQ3_2: Q3.2 R4.1 | length 126.9
  Top Layer w39.37: Q3.2 3220,3488.94 R4.1
NetQ4_2: Q4.2 R5.1 | length 126.9
  Top Layer w39.37: Q4.2 3443.82,3488.94 R5.1
NetQ5_2: Q5.2 R6.1 | length 126.9
  Top Layer w39.37: Q5.2 R6.1
NetQ6_2: Q6.2 R7.1 | length 126.9
  Top Layer w39.37: Q6.2 R7.1
NetQ7_2: Q7.2 R8.1 | length 126.9
  Top Layer w39.37: Q7.2 4120,3488.94 R8.1
NetQ8_2: Q8.2 R9.1 | length 126.9
  Top Layer w39.37: Q8.2 R9.1
NetR1_1: R1.1 SW1.1 U1.1 | length 383.5
  Top Layer w59.06: U1.1 5590,1910 R1.1 5705,1905 5793,1993 SW1.1
NetR2_2: R2.2 U2.15 | length 884.4
  Top Layer w51.18: R2.2 2771.77,3728.07 3113.7,4070 3285,4070 3405,4190 3405,4234.52 3402.84,4236.69 3402.84,4243.15 U2.15@3404.86,4245.18
NetR3_2: R3.2 U2.1 | length 375.9
  Top Layer w51.18: R3.2 2999.92,3732.99 3077.99,3732.99 U2.1@3283.66,3938.66
NetR4_2: R4.2 U2.2 | length 297.3
  Top Layer w51.18: R4.2 3233.07,3728.07 3400,3895 U2.2@3400,3943.15
NetR5_2: R5.2 U2.3 | length 238.9
  Top Layer w51.18: R5.2 3448.74,3732.99 3451.69,3732.99 3451.69,3781.69 3495,3825 3495,3934.52 3497.16,3936.69 U2.3@3497.16,3943.15
NetR6_2: R6.2 U2.4 | length 238.9
  Top Layer w51.18: U2.4@3597.16,3943.15 3595,3940.99 3595,3800.12 R6.2@3662.13,3732.99
NetR7_2: R7.2 U2.5 | length 345.5
  Top Layer w51.18: U2.5 3700,3850 3821.93,3728.07 R7.2
NetR8_2: R8.2 U2.6 | length 438.3
  Top Layer w51.18: U2.6 3802.84,3947.16 3802.84,3902.16 3905,3800 4045,3800 4116.93,3728.07 R8.2
NetR9_2: R9.2 U2.7 | length 554.5
  Top Layer w51.18: U2.7 3902.84,3947.16 3902.84,3917.16 3945.72,3874.28 4195.84,3874.28 4342.05,3728.07 R9.2
NetR10_1: R10.1 U3.15 | length 587.2
  Top Layer w51.18: R10.1 4705,2865 4795,2775 4795,2705 4867.16,2632.84 4892.16,2632.84 U3.15
NetR11_1: R11.1 U3.1 | length 157.1
  Top Layer w51.18: R11.1 4575,2750 U3.1
NetR12_1: R12.1 U3.2 | length 150.9
  Top Layer w51.18: R12.1 4585.99,2635 4590.99,2630 U3.2
NetR13_1: R13.1 U3.3 | length 151.4
  Top Layer w51.18: R13.1 4449.41,2527.16 4592.16,2527.16 U3.3
NetR14_1: R14.1 U3.4 | length 159.8
  Top Layer w51.18: R14.1 4446.14,2410.75 4451.06,2415.67 4525.67,2415.67 4537.16,2427.16 4592.16,2427.16 U3.4
NetR15_1: R15.1 U3.5 | length 163.8
  Top Layer w51.18: R15.1 4518.9,2293.9 4552.16,2327.16 4592.16,2327.16 U3.5
NetR16_1: R16.1 U3.6 | length 170
  Top Layer w51.18: R16.1 4513.9,2178.9 4557.59,2222.59 4583.58,2222.59 4590.99,2230 U3.6
NetR17_1: R17.1 U3.7 | length 179.9
  Top Layer w51.18: R17.1 4450.36,2059.22 4509.22,2059.22 4567.72,2117.72 4578.71,2117.72 4590.99,2130 U3.7
NetS1_2: S1.2 U1.11 | length 1214.7
  Bottom Layer w51.18: U1.11 5476.51,2911.51 5536.51,2911.51 5640,3015 5920,3015 6037.5,2897.5 6037.5,2612.5 S1.2@6037.5,2337.5
NetS2_2: S2.2 U1.12 | length 861.3
  Bottom Layer w51.18: U1.12 5476.51,3011.51 5526.51,3011.51 5655,3140 6007.5,3140 6037.5,3170 S2.2@6037.5,3402.5
NetS3_2: S3.2 U1.13 | length 1032.7
  Bottom Layer w51.18: S3.2@5057.5,3787.5 5332.5,3787.5 5380,3740 5380,3168.92 5437.41,3111.51 5473.49,3111.51 U1.13
NetS4_2: S4.2 U1.14 | length 991.8
  Bottom Layer w51.18: U1.14@5484.84,3210 U1.14 5475,3475 5787.5,3787.5 S4.2@6062.5,3787.5
NetU1_4: U1.4
NetU1_5: U1.5
NetU1_6: U1.6
NetU1_15: U1.15
NetU1_16: U1.16 U2.11 U3.11 | length 3162.2
  Top Layer w39.37: U2.11 3800,4191.81 3922.09,4069.72 4190.28,4069.72 4710,3550 v1(4710,3020) ; v1(4710,2735) 4710,2365 4845,2230 U3.11
  Bottom Layer w39.37: v1(4710,2735) v1(4710,3020)
  Bottom Layer w59.06: v1(4710,3020) 4800,3110 U1.16
NetU1_17: U1.17 U2.14 | length 2563.4
  Bottom Layer w59.06: U2.14 3501.33,4248.67 3501.33,4213.67 3580,4135 4405,4135 5295,3245 5295,3050 5255,3010 U1.17
NetU1_18: U1.18 U2.12 U3.12 | length 3095.1
  Top Layer w39.37: U2.12 3705.1,4255.1 3705.1,4282.9 3734.89,4312.69 4262.31,4312.69 5065,3510 5065,2500 U3.12
  Bottom Layer w59.06: v1(5070,2910) U1.18
NetU1_19: U1.19
NetU1_24: U1.24
NetU1_25: U1.25
NetU1_26: U1.26
NetU1_27: U1.27
NetU1_28: U1.28
NetU2_9: U2.9 U3.14 | length 2324.2
  Top Layer w39.37: U2.9 4045,4205 4248.17,4205 5000,3453.17 5000,2588.06 4947.03,2535.1 4900.1,2535.1 U3.14
pads on no net: U1.21 U3.9
copper on no net: | length 13510
  Bottom Layer w39.37: 2600,1415 2600,4410 6360,4410 6360,1415 2600,1415